# Altium PCB fr4_light_sensor_programmer.PcbDoc
Units mm, origin at the board's own origin, x right, y up, seen from the top; angles counter-clockwise.
Board outline 56.26 x 66.8 mm, 2 copper layers (Top Layer, Bottom Layer); 26 components, 22 nets, 118 pads, 6 vias.
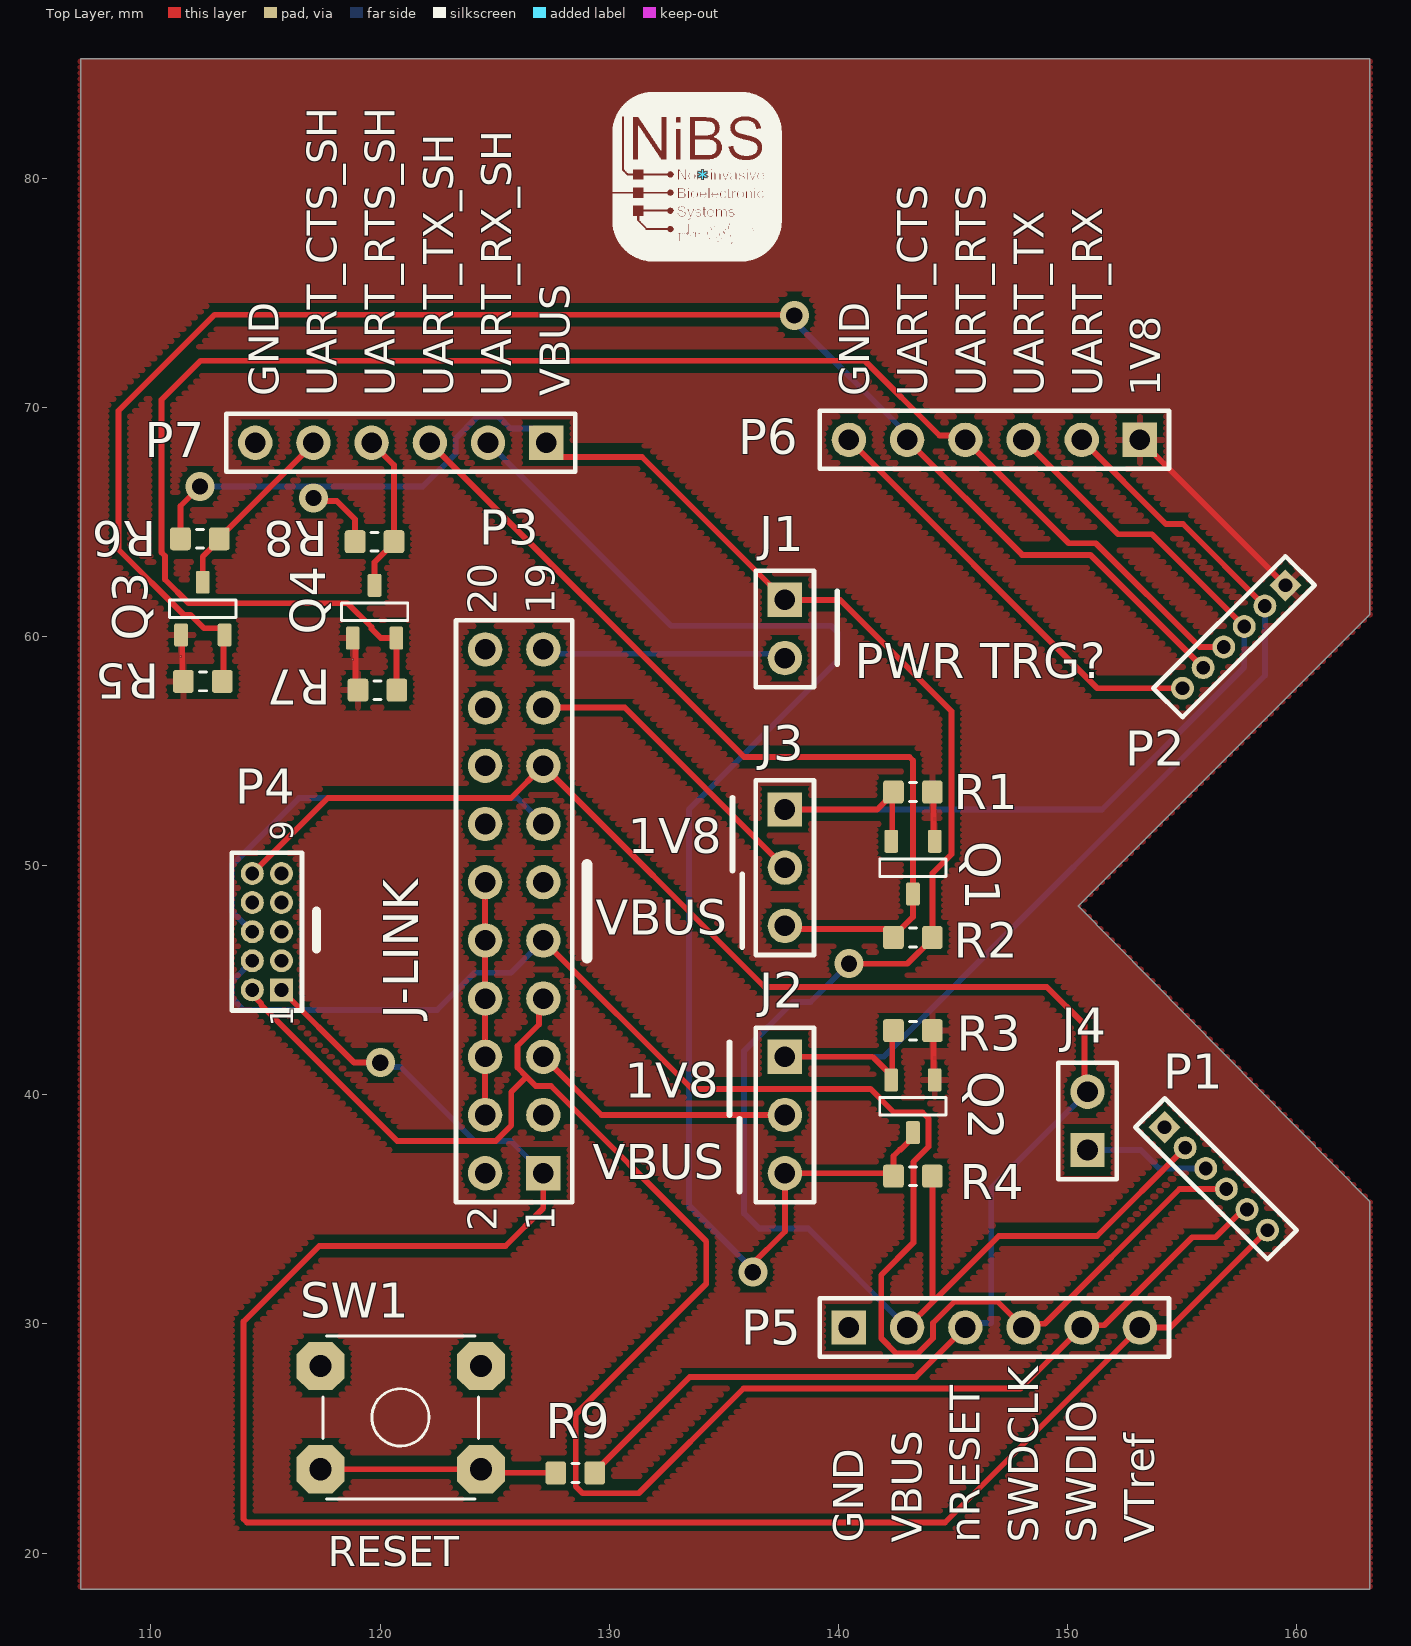
[diagram p0: Top Layer view]
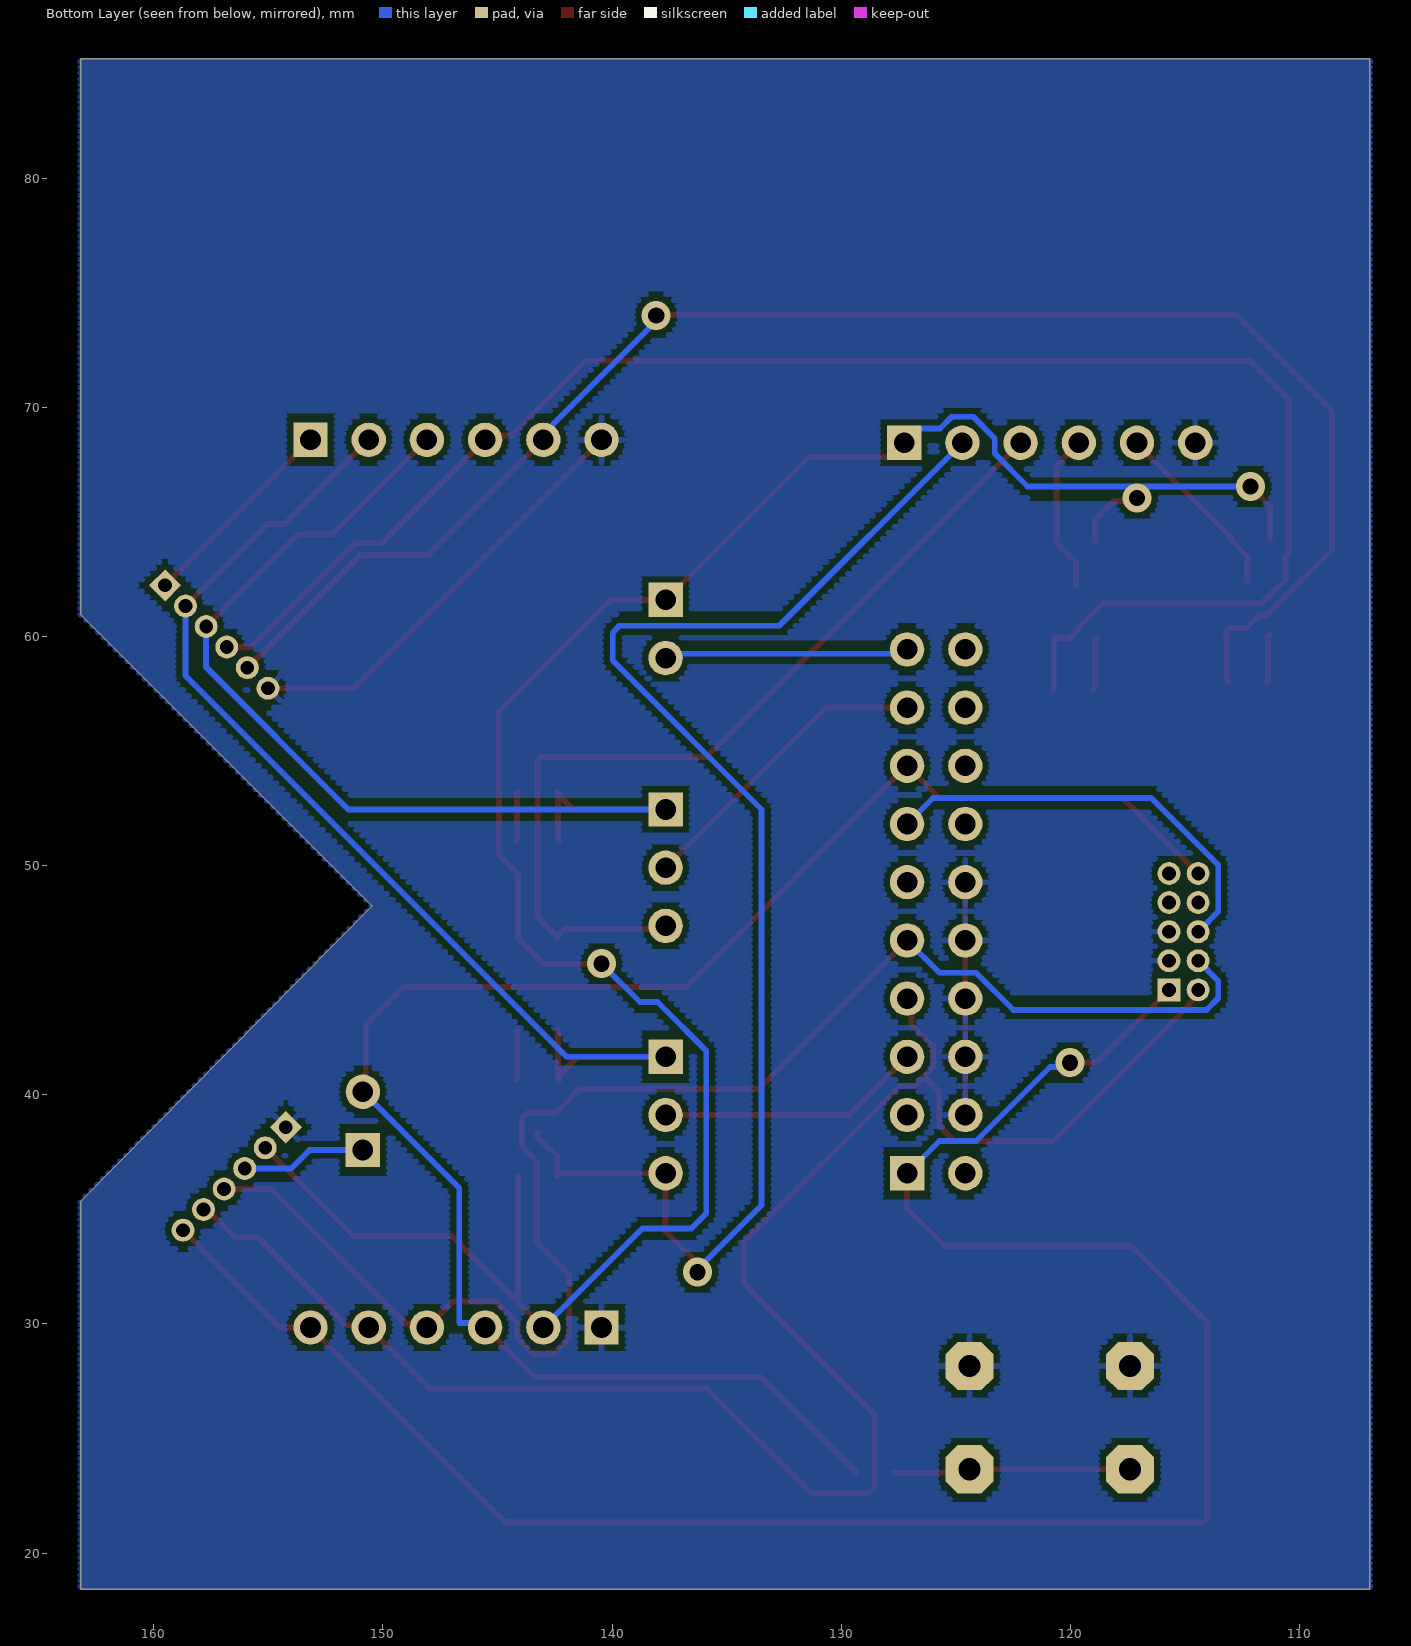
[diagram p1: Bottom Layer view, seen from below]
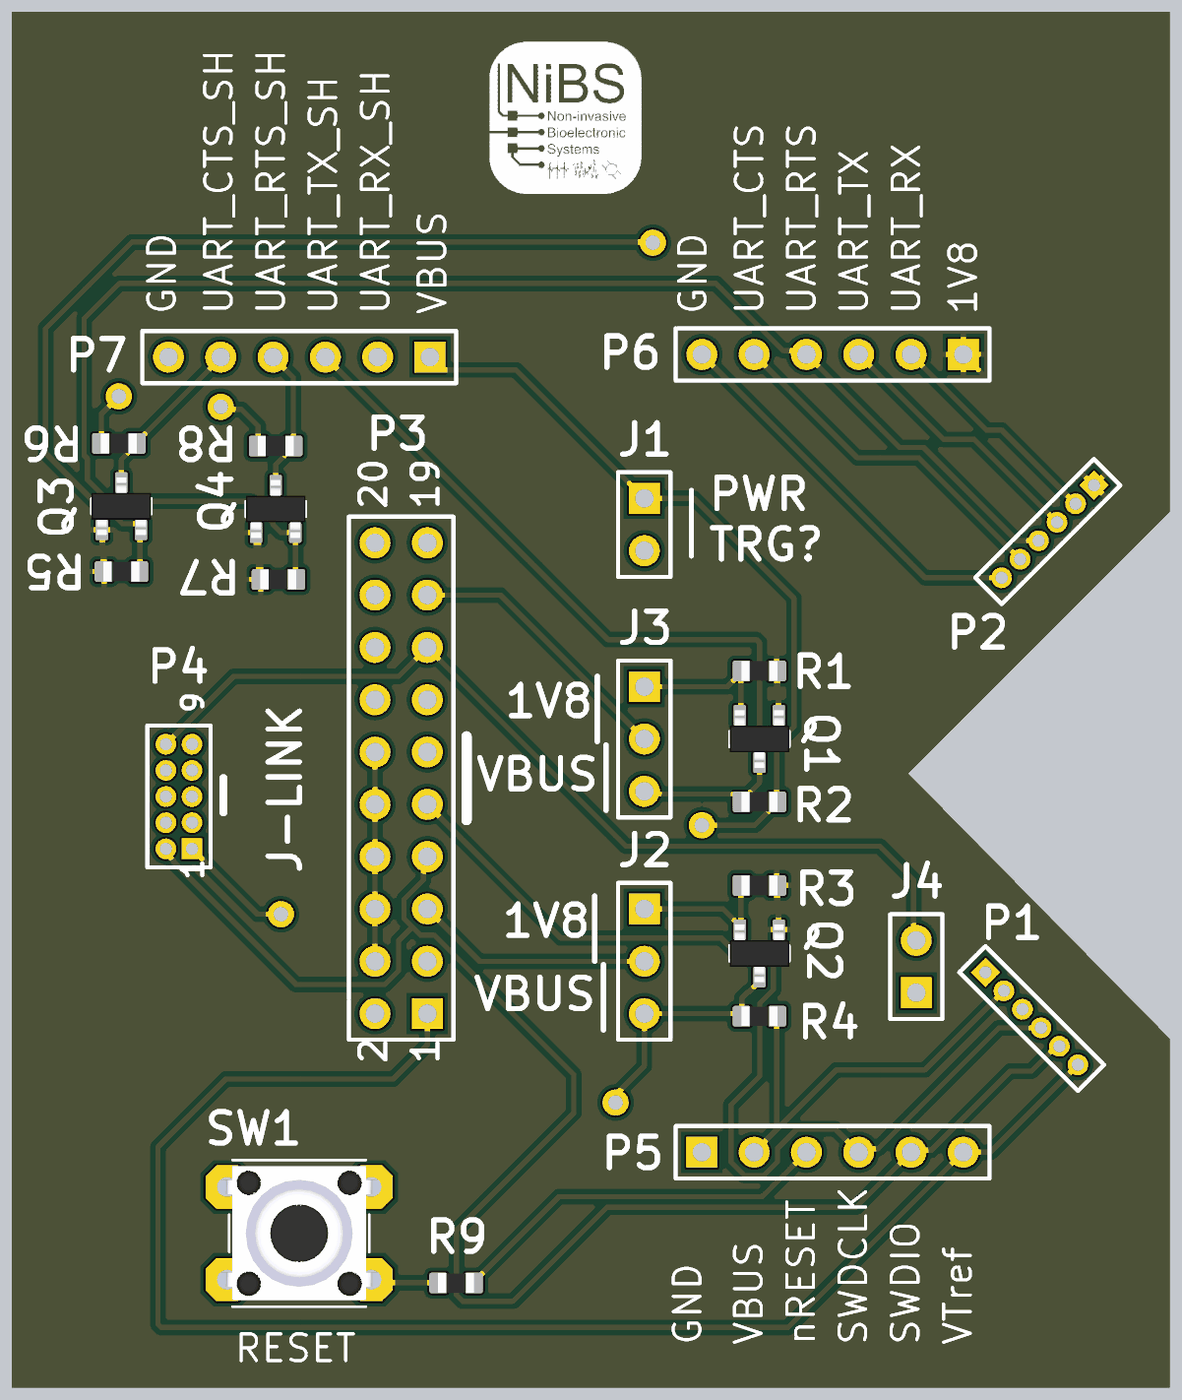
[diagram p2: 3D render of the assembled board from above, using the file's embedded part models]

## Layer stack, top to bottom
Top Solder: solder mask 0.0102, Solder Resist, Dk 3.5
Top Layer: signal copper 0.0356
Dielectric 1: dielectric 0.32, FR-4, Dk 4.8
Bottom Layer: signal copper 0.0356
Bottom Solder: solder mask 0.0102, Solder Resist, Dk 3.5

## Board outline
163.195,60.96 150.473,48.238 163.195,35.343 163.195,18.415 106.934,18.415 106.934,85.217 163.195,85.217

## Design rules (kind name [scope] priority, off if disabled: settings)
Clearance [All] p1: gap=0.254 ignorepadtopadclearanceinfootprint=FALSE except(0: Arc-Hole Track-Hole SMDPad-Hole THPad-Hole Via-Hole Fill-Hole Poly-Hole Region-Hole Text-Hole)
PolygonConnect [All] p1: connectstyle=Relief reliefconductorwidth=0.254 reliefentries=4 polygonreliefangle="90 Angle" airgapwidth=0.254
RoutingVias [All] p1: holewidth=0.711 width=1.27 viastyle="Through Hole" minholewidth=0.711 minwidth=1.27 maxholewidth=0.711 maxwidth=1.27
SolderMaskExpansion [All] p1: expansion=0.102 istentingtop=FALSE
Width [All] p1: maxlimit=0.254 minlimit=0.254 preferedwidth=0.254
30 further rules are at their usual default settings.

## Components (designator, comment, footprint, x,y, rotation, side; value= is the part's Value field where it differs from the comment)
* "NIBS_Logo" Logo 134.112,80.01 r0 top
J1 "VBUS Jumper" HDR1X2 137.668,61.595 r270 top
J2 "UART Level Converter Jumper" HDR1X3 137.668,41.656 r270 top
J3 "UART Level Converter Jumper" HDR1X3 137.668,52.451 r270 top
J4 "nRESET" HDR1X2 150.876,37.592 r90 top
P1 "MHDR1X6" MHDR1X6 154.238,38.582 r315 top locked
P2 "MHDR1X6" MHDR1X6 159.512,62.23 r225 top locked
P3 "J-LINK" HDR2X10 127.127,36.576 r90 top
P4 "J-LINK Mini" MHDR2X5 115.697,44.577 r90 top
P5 "SWD" HDR1X6 140.462,29.845 r0 top
P6 "UART_1V8" HDR1X6 153.162,68.58 r180 top
P7 "UART_5V" HDR1X6 127.254,68.453 r180 top
Q1 "BSS123" SOT23-3 143.256,49.911 r270 top
Q2 "BSS123" SOT23-3 143.256,39.497 r270 top
Q3 "BSS123" SOT23-3 112.268,61.214 r90 top
Q4 "BSS123" SOT23-3 119.761,61.08 r90 top
R1 "Thick Film" RESC1608X55N 143.256,53.213 r180 top value=10k
R2 "Thick Film" RESC1608X55N 143.256,46.863 r180 top value=10k
R3 "Thick Film" RESC1608X55N 143.256,42.799 r180 top value=10k
R4 "Thick Film" RESC1608X55N 143.256,36.449 r180 top value=10k
R5 "Thick Film" RESC1608X55N 112.268,58.039 r0 top value=10k
R6 "Thick Film" RESC1608X55N 112.141,64.262 r0 top value=10k
R7 "Thick Film" RESC1608X55N 119.888,57.658 r0 top value=10k
R8 "Thick Film" RESC1608X55N 119.761,64.135 r0 top value=10k
R9 "Thick Film" RESC1608X55N 128.524,23.495 r180 top value=150R
SW1 "SW_THT_PB_4.3mm" TACT-SWITCH-TS1143 120.904,25.908 r0 top

## Footprints (in the part's own frame and the unit in brackets; to place one, negate y for a bottom-side part, rotate by r counter-clockwise, add the part's x,y. Pads: shape width x height; smd on the part's side, far side on the other; paste and mask are expansions set on the pad)
HDR1X2 [mm] "Connector; Header; 2 Position"
  rect 1.5x1.5 hole 0.9: 1(0,0)
  round 1.5 hole 0.9: 2(2.54,0)
  silkscreen extent -1.27,-1.27 3.81,1.27
HDR1X3 [mm] "Connector; Header; 3 Position"
  rect 1.5x1.5 hole 0.9: 1(0,0)
  round 1.5 hole 0.9: 2(2.54,0) 3(5.08,0)
  silkscreen extent -1.27,-1.27 6.35,1.27
HDR1X6 [mm] "Connector; Header; 6 Position"
  rect 1.5x1.5 hole 0.9: 1(0,0)
  round 1.5 hole 0.9: 2(2.54,0) 3(5.08,0) 4(7.62,0) 5(10.16,0) 6(12.7,0)
  silkscreen extent -1.27,-1.27 13.97,1.27
HDR2X10 [mm] "Connector; Header; 10x2 Position"
  rect 1.5x1.5 hole 0.9: 1(0,0)
  round 1.5 hole 0.9: 2(0,2.54) 3(2.54,0) 4(2.54,2.54) 5(5.08,0) 6(5.08,2.54) 7(7.62,0) 8(7.62,2.54) 9(10.16,0) 10(10.16,2.54) 11(12.7,0) 12(12.7,2.54) 13(15.24,0) 14(15.24,2.54) 15(17.78,0) 16(17.78,2.54) 17(20.32,0) 18(20.32,2.54) 19(22.86,0) 20(22.86,2.54)
  silkscreen extent -1.27,-1.27 24.13,3.81
Logo [mm]
  silkscreen extent -3.96,-3.62 3.42,3.75
MHDR1X6 [mm] "Connector; Header; 6 Position"
  rect 1x1 hole 0.6: 1(0,0)
  round 1 hole 0.6: 2(1.27,0) 3(2.54,0) 4(3.81,0) 5(5.08,0) 6(6.35,0)
  silkscreen extent -0.9,-0.9 7.25,0.9
MHDR2X5 [mm] "Connector; Header; 5x2 Position"
  rect 1x1 hole 0.6: 1(0,0)
  round 1 hole 0.6: 2(0,1.27) 3(1.27,0) 4(1.27,1.27) 5(2.54,0) 6(2.54,1.27) 7(3.81,0) 8(3.81,1.27) 9(5.08,0) 10(5.08,1.27)
  silkscreen extent -0.9,-0.9 5.98,2.17
RESC1608X55N [mm] "Chip Resistor, Body 1.6x0.8mm, EIA 0603, IPC Medium Density"
  round 0.254 on Mech15: 0(0,0)
  rrect25% 0.9x1 smd: 1(-0.85,0) 2(0.85,0)
  Top Layer pour cut-out: -0.6,0.5 -0.4,0.7 0.4,0.7 0.6,0.5 0.6,-0.5 0.4,-0.7 -0.4,-0.7 -0.6,-0.5
  silkscreen extent -0.15,-0.41 0.15,0.41, body extent -0.87,-0.47 0.88,0.48, height 0.54
SOT23-3 [mm] "SOT23, 3 pin"
  round 0.5 on Mech15: 0(0,0)
  rrect25% 1x0.6 smd: 1(-1.15,0.95) 2(-1.15,-0.95) 3(1.15,0)
  silkscreen extent -0.38,-1.45 0.38,1.45, body extent -1.4,-1.45 1.4,1.45, height 1.29
TACT-SWITCH-TS1143 [mm] "Bondtact sealed TH tact switch"
  round 0.508 on Mech15: 0(0,0)
  oct 2.1x2.1 hole 0.965: 1(-3.5,-2.25) 1(3.5,-2.25) 2(-3.5,2.25) 2(3.5,2.25)
  silkscreen extent -3.4,-3.56 3.4,3.56, body extent -4.13,-3.25 4.13,3.25, height 4.3

## Part data
J1 J4: library part "Header 2", "Header, 2-Pin", LatestRevisionDate=17-Jul-2002, LatestRevisionNote="Re-released for DXP Platform.", Publisher="Altium Limited"
J2 J3: library part "Header 3", "Header, 3-Pin", LatestRevisionDate=17-Jul-2002, LatestRevisionNote="Re-released for DXP Platform.", Publisher="Altium Limited"
P1 P2: "Header, 6-Pin", LatestRevisionDate=17-Jul-2002, LatestRevisionNote="Re-released for DXP Platform.", Publisher="Altium Limited"
P3: library part "Header 10X2", "Header, 10-Pin, Dual row", LatestRevisionDate=17-Jul-2002, LatestRevisionNote="Re-released for DXP Platform.", Publisher="Altium Limited"
P4: library part MHDR2X5, "Header, 5-Pin, Dual row", LatestRevisionDate=17-Jul-2002, LatestRevisionNote="Re-released for DXP Platform.", Publisher="Altium Limited"
P5 P6 P7: library part "Header 6", "Header, 6-Pin", LatestRevisionDate=17-Jul-2002, LatestRevisionNote="Re-released for DXP Platform.", Publisher="Altium Limited"
Q1 Q2 Q3 Q4: library part MOSFET_BSS123, "MOSFET SMD N-CH 100V 170mA SOT23-3", Manufacturer 1="Diodes Inc", Manufacturer Part Number 1=BSS123-7-F, Package / Case=SOT23-3, Ratings="100V; 170mA", Supplier Part Number 1=BSS123-FDICT-ND, Material="Metal Oxide", SCDType=source, Supplier 1=Digi-Key
R1 R2 R3 R4 R5 R6 R7 R8 R9: library part RES_10K_0603_1%, "Resistor SMD chip 10k Ohm 0.1W 1% 0603", Manufacturer 1=Yageo, Manufacturer Part Number 1=RC0603FR-0710KL, Package / Case="0603 (1608 Metric)", Ratings=1/10W, Supplier Part Number 1=311-10.0KHRCT-ND, Tolerance=±1%, SCDType=spec, Supplier 1=Digi-Key
SW1: "Switch, tact, 4.3mm stem", Manufacturer 1=Bond-Tact, Manufacturer Part Number 1=TS-1143-WP-300, Package / Case="6.5x6.5mm; 4.3mm stem", Function=Speed, Material="Brass/Nylon/Ag plating", SCDType=spec

## Via types
v1: diameter 1.27, hole 0.711, Top Layer to Bottom Layer, 6 vias

## Nets (pads, with @x,y where several pads share a name; then routed paths per layer and width w, separated by ;. In a path a pad name is that pad's centre, name@x,y a point inside that pad or via, vN(x,y) a via of type N, cw(c..) or ccw(c..) an arc to the next point about the centre after c; other vN are vias at no path point)
1V8: P2.1 P6.1 Q1.1 Q2.1 Q3.1 Q4.1 R1.1 R3.1 R5.1 R7.1 | length 17.8
  Top Layer w0.254: Q3.1 111.368,60.014 111.368,58.089 R5.1 ; Q4.1 118.924,59.816 118.924,57.772 R7.1 ; R3.1 144.156,42.749 144.156,40.697 Q2.1 ; R1.1 144.156,53.163 144.156,51.111 Q1.1 ; P6.1 P2.1
5V: J1.2 P3.19 | length 10.7
  Bottom Layer w0.254: P3.19 127.317,59.245 137.477,59.245 J1.2
GND: P1.1 P2.6 P3.4 P3.6 P3.8 P3.10 P3.12 P4.3 P4.5 P5.1 P6.6 P7.6 SW1.2 | length 29.2
  Top Layer w0.254: P3.4 P3.10 P3.12 ; P6.6 151.302,57.74 P2.6
JLINK_Rx: J3.2 P3.17 | length 13.4
  Top Layer w0.254: P3.17 130.683,56.896 J3.2
JLINK_Tx: J2.2 P3.5 | length 11.6
  Top Layer w0.254: P3.5 129.667,39.116 J2.2
NetR9_2: R9.2 SW1.1 | length 10.3
  Top Layer w0.254: SW1.1@117.404,23.658 124.404,23.658 124.554,23.508 127.661,23.508 R9.2
nRESET: J4.2 P3.15 P4.10 P5.3 R9.1 | length 77.8
  Top Layer w0.254: P4.10 117.717,52.947 125.718,52.947 P3.15 136.779,44.704 149.098,44.704 150.749,43.053 150.749,40.259 J4.2 ; R9.1 129.374,23.545 133.515,27.686 143.383,27.686 P5.3
  Bottom Layer w0.254: P5.3 145.732,30.035 146.673,30.035 146.673,35.929 J4.2
nRESET_J: J4.1 P1.3 | length 5.5
  Bottom Layer w0.254: J4.1 153.2,37.592 154.006,36.786 P1.3
SWDCLK: P1.4 P3.9 P4.4 P5.4 | length 67.2
  Top Layer w0.254: P3.9 133.616,40.247 141.411,40.247 142.43,39.228 143.67,39.228 143.937,38.961 143.937,37.733 143.275,37.071 143.275,33.54 141.871,32.136 141.871,29.377 142.534,28.714 143.47,28.714 144.133,29.377 144.133,30.035 145.074,30.976 146.951,30.976 P5.4 148.247,30.01 149.009,30.01 154.887,35.888 P1.4
  Bottom Layer w0.254: P4.4 113.546,44.966 113.546,44.212 114.062,43.696 122.488,43.696 124.119,45.327 125.718,45.327 P3.9
SWDIO: P1.5 P3.7 P4.2 P5.5 | length 79.3
  Top Layer w0.254: P4.2 114.427,44.375 114.816,43.986 114.816,43.919 120.75,37.985 125.055,37.985 125.726,38.656 125.726,40.116 126.397,40.787 ; P3.7 126.937,44.006 126.937,43.065 125.996,42.124 125.996,41.188 126.397,40.787 ; P1.5 157.672,34.99 156.464,33.782 155.448,33.782 151.604,29.938 150.715,29.938 P5.5 147.955,27.178 135.86,27.178 131.296,22.614 128.832,22.614 128.543,22.903 128.543,26.054 134.239,31.75 134.239,33.603 127.456,40.386 126.798,40.386 126.397,40.787
SWO: P3.13 P4.6 | length 18.5
  Bottom Layer w0.254: P4.6 113.546,47.998 113.546,50.022 116.471,52.947 125.996,52.947 P3.13
TDI: P4.8
UART_CTS: P2.5 P6.5 Q3.2 R5.2 | length 70.1
  Top Layer w0.254: R5.2 113.168,58.089 113.168,60.014 Q3.2 113.218,60.189 113.045,60.362 112.315,60.362 111.732,60.945 111.438,60.945 108.585,63.798 108.585,69.85 112.776,74.041 138.049,74.041 v1(138.081,74.009) ; P6.5 148.021,63.561 150.997,63.561 P2.5
  Bottom Layer w0.254: v1(138.081,74.009) 138.081,73.755 143.002,68.834 P6.5
UART_CTS_SHIFTER: P7.5 Q3.3 R6.2 | length 8.1
  Top Layer w0.254: Q3.3 112.268,63.489 112.991,64.212 R6.2 112.991,64.312 117.094,68.415 P7.5
UART_RTS: P2.4 P6.4 Q4.2 R7.2 | length 73.6
  Top Layer w0.254: R7.2 120.725,57.672 120.725,59.916 Q4.2 120.03,59.93 119.627,60.333 119.627,60.408 118.583,61.453 111.648,61.453 110.617,62.484 110.617,63.513 110.46,63.67 110.46,70.328 112.163,72.031 141.151,72.031 144.411,68.77 145.352,68.77 P6.4 150.053,64.069 151.236,64.069 155.77,59.536 P2.4
UART_RTS_SHIFTER: P7.4 Q4.3 R8.2 | length 7
  Top Layer w0.254: P7.4 120.611,67.476 R8.2 120.611,64.085 119.761,63.235 Q4.3
UART_RX: J2.1 P2.2 P6.2 Q2.2 R3.2 | length 49.2
  Top Layer w0.254: J2.1 141.497,41.656 142.306,40.847 Q2.2 142.356,40.697 142.356,42.749 R3.2 ; P6.2 154.294,64.908 155.038,64.908 P2.2
  Bottom Layer w0.254: J2.1 141.986,41.656 158.623,58.293 158.623,60.11 158.614,60.119 P2.2
UART_RX_SHIFTER: J2.3 P7.2 Q2.3 R4.2 | length 62.1
  Top Layer w0.254: v1@136.144,32.512 137.668,34.036 J2.3 142.279,36.576 R4.2 142.406,37.33 142.691,37.615 142.724,37.615 143.256,38.147 Q2.3
  Bottom Layer w0.254: P7.2 132.703,60.464 139.688,60.464 139.976,60.176 139.976,58.95 133.477,52.451 133.477,35.179 v1@136.271,32.385
  other v1: 136.271,32.258
UART_TX: J3.1 P2.3 P6.3 Q1.2 R1.2 | length 44.6
  Top Layer w0.254: J3.1 141.694,52.451 R1.2@142.356,53.113 ; Q1.2 142.356,51.111 R1.2@142.356,53.113 ; R1.2 142.356,53.163 R1.2@142.356,53.113 ; P6.3 152.203,64.459 153.691,64.459 P2.3
  Bottom Layer w0.254: J3.1 151.511,52.451 157.716,58.656 P2.3
UART_TX_SHIFTER: J3.3 P7.3 Q1.3 R2.2 | length 39.8
  Top Layer w0.254: P7.3 135.89,54.737 143.107,54.737 143.256,54.588 Q1.3 143.256,47.763 R2.2@142.406,46.913 ; J3.3 137.803,47.236 142.083,47.236 R2.2@142.406,46.913 ; R2.2 R2.2@142.406,46.913
VBUS: J1.1 P1.2 P5.2 P7.1 R2.1 R4.1 R6.1 R8.1 | length 103.2
  Top Layer w0.254: R6.1 111.291,65.698 v1(112.141,66.548) ; v1(117.094,66.04) 117.221,65.913 118.11,65.913 118.911,65.112 R8.1 ; P7.1 127.877,67.83 131.433,67.83 J1.1 140.081,61.595 144.937,56.739 144.937,50.497 144.106,49.666 R2.1 144.106,46.813 143.013,45.72 v1(140.462,45.72) ; P5.2 144.106,30.949 ; R4.1 144.106,30.949 ; P1.2 151.293,33.841 146.998,33.841 144.106,30.949
  Bottom Layer w0.254: v1(112.141,66.548) 121.868,66.548 123.305,67.985 123.305,68.643 124.246,69.584 125.184,69.584 125.692,69.076 126.631,69.076 P7.1 ; v1(140.462,45.72) 138.787,44.045 138.018,44.045 135.89,41.917 135.89,34.82 136.547,34.163 138.684,34.163 P5.2
VTref: P1.6 P3.1 P4.1 P5.6 | length 90
  Top Layer w0.254: P4.1 118.872,41.402 v1(120.015,41.402) ; P3.1 127.127,35.052 125.476,33.401 117.348,33.401 114.046,30.099 114.046,21.485 114.195,21.336 144.653,21.336 P5.6 154.481,29.845 P1.6
  Bottom Layer w0.254: v1(120.015,41.402) 120.209,41.208 120.896,41.208 124.119,37.985 125.718,37.985 126.504,37.199 P3.1
pads on no net: P3.2 P3.3 P3.11 P3.14 P3.16 P3.18 P3.20 P4.7 P4.9 Q1.0 Q2.0 Q3.0 Q4.0 R1.0 R2.0 R3.0 R4.0 R5.0 R6.0 R7.0 R8.0 R9.0 SW1.0

## Polygon pours and split planes (outlines as drawn)
1V8 on Top Layer "1V8" (hatched Horizontal grid 0.254 track 0.254, pour order 4): 163.195,60.96 150.473,48.238 163.195,35.343 163.195,18.415 106.934,18.415 106.934,85.217 163.195,85.217
GND on Bottom Layer "GND" (hatched Horizontal grid 0.254 track 0.254, pour order 5): 163.195,60.96 150.473,48.238 163.195,35.343 163.195,18.415 106.934,18.415 106.934,85.217 163.195,85.217

## Silkscreen, mask and mechanical layers (free items; w line width, h text height)
Top Overlay:
  lines w0.254: 135.255,39.116 135.255,42.291 ; 135.382,49.784 135.382,52.959 ; 135.681,35.779 135.681,38.954 ; 135.808,46.447 135.808,49.622 ; 139.954,58.801 139.954,61.976
  lines w0.4: 117.221,46.355 117.221,48.006
  lines w0.5: 129.032,45.974 129.032,50.038
  text "GND" at 115.57,70.485 h1.3 r90
  text "UART_CTS_SH" at 118.11,70.485 h1.3 r90
  text "UART_RTS_SH" at 120.65,70.485 h1.3 r90
  text "UART_TX_SH" at 123.19,70.485 h1.3 r90
  text "UART_RX_SH" at 125.73,70.485 h1.3 r90
  text "VBUS" at 128.27,70.485 h1.3 r90
  text "GND" at 141.351,70.485 h1.3 r90
  text "UART_CTS" at 143.891,70.485 h1.3 r90
  text "UART_RTS" at 146.431,70.485 h1.3 r90
  text "UART_TX" at 148.971,70.485 h1.3 r90
  text "UART_RX" at 151.511,70.485 h1.3 r90
  text "1V8" at 154.051,70.485 h1.3 r90
  text "PWR TRG?" at 140.716,58.166 h1.52
  text "1V8" at 130.81,50.546 h1.52
  text "VBUS" at 129.413,46.99 h1.52
  text "J-LINK" at 121.666,43.307 h1.52 r90
  text "1V8" at 130.683,39.878 h1.52
  text "VBUS" at 129.286,36.322 h1.52
  text "GND" at 141.097,20.447 h1.3 r90
  text "VBUS" at 143.637,20.447 h1.3 r90
  text "nRESET" at 146.177,20.447 h1.3 r90
  text "SWDCLK" at 148.717,20.447 h1.3 r90
  text "SWDIO" at 151.257,20.447 h1.3 r90
  text "VTref" at 153.797,20.447 h1.3 r90
  text "RESET" at 117.729,19.431 h1.3

## Text inside footprints (layer, text, board x,y; h text height)
P3: Top Overlay "19" at 127.635,60.96 h1.27 r90; Top Overlay "20" at 125.095,60.96 h1.27 r90; Top Overlay "1" at 127.635,34.036 h1.27 r90; Top Overlay "2" at 125.095,34.036 h1.27 r90
P4: Top Overlay "1" at 116.205,42.977 h1 r90; Top Overlay "9" at 116.205,51.077 h1 r90